# Altium PCB sparkfun-battery-babysitter.PcbDoc
Units mil, origin at the board's own origin, x right, y up, seen from the top; angles counter-clockwise.
Board outline 1300 x 1300 mil, 2 copper layers (Top, Bottom), stack 61.811 mil thick; 58 components, 31 nets, 150 pads, 51 vias.
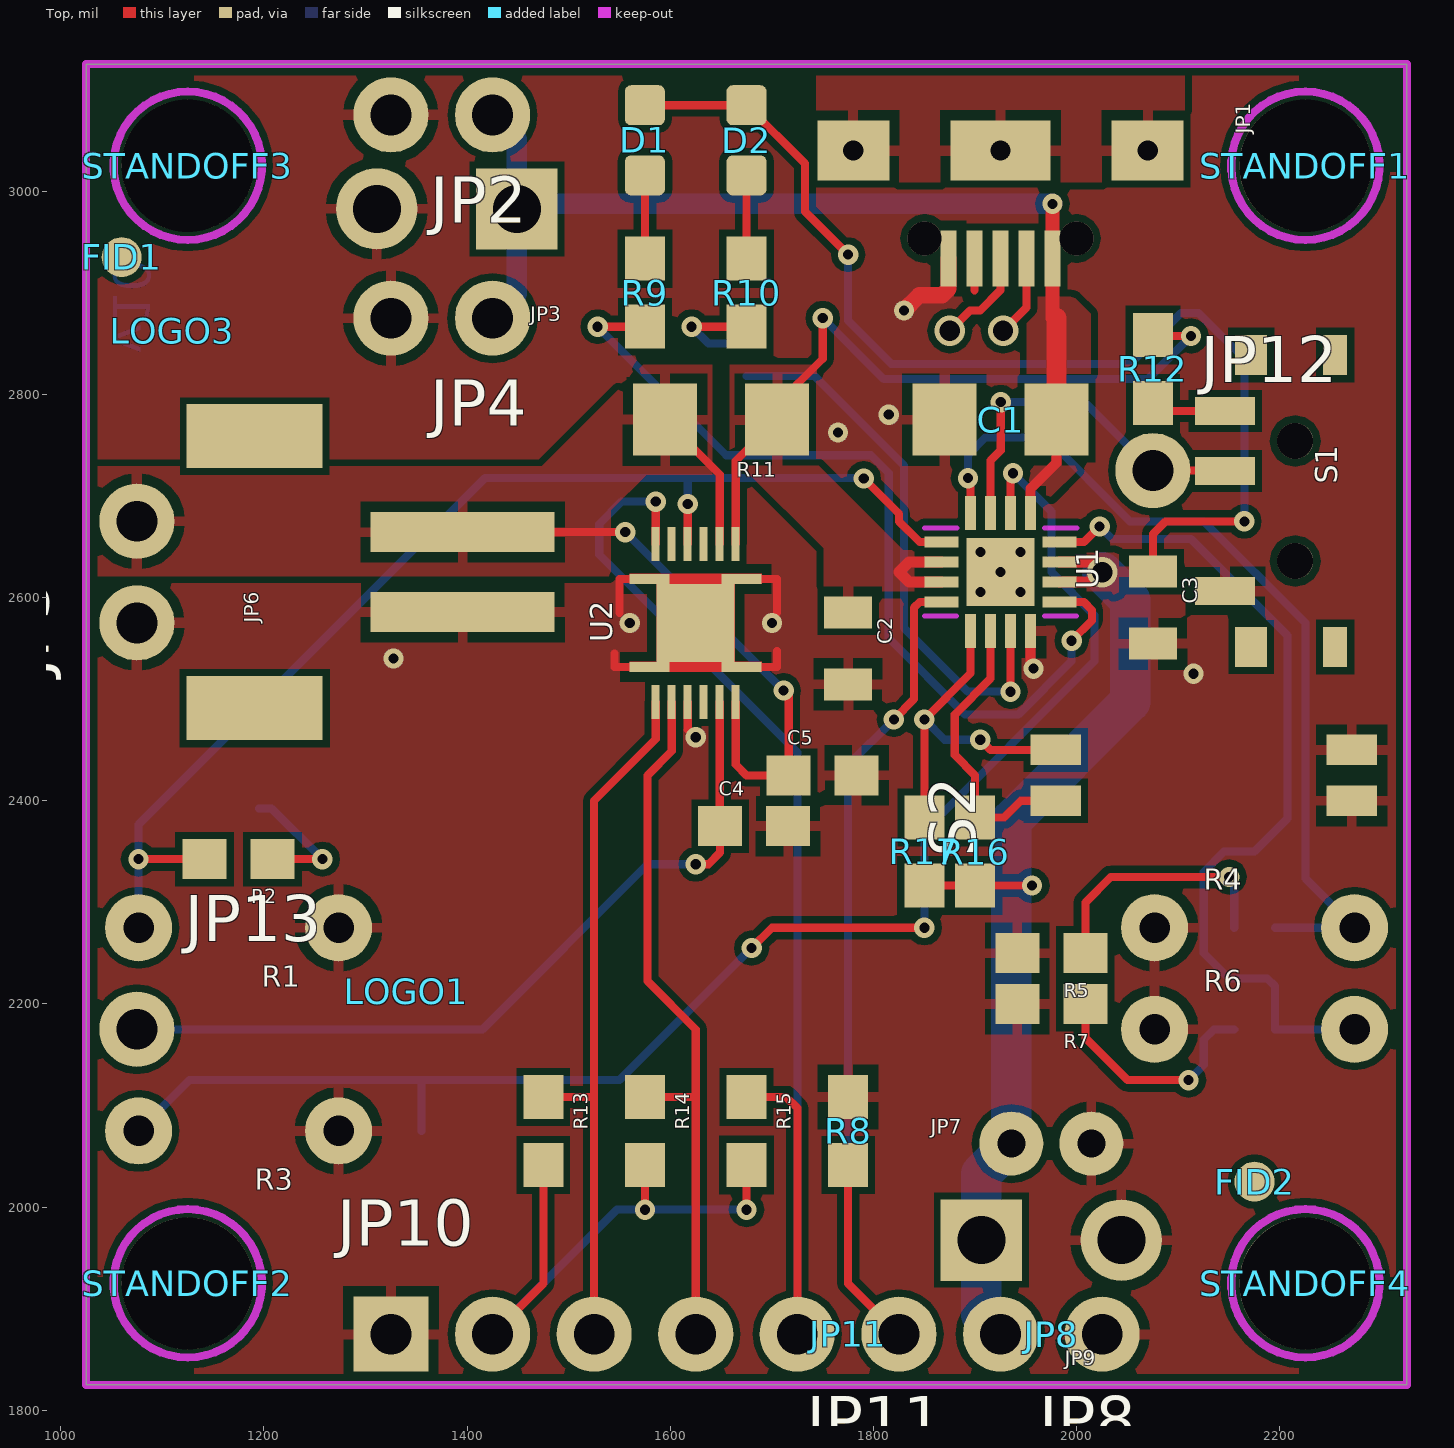
[diagram p0: Top view]
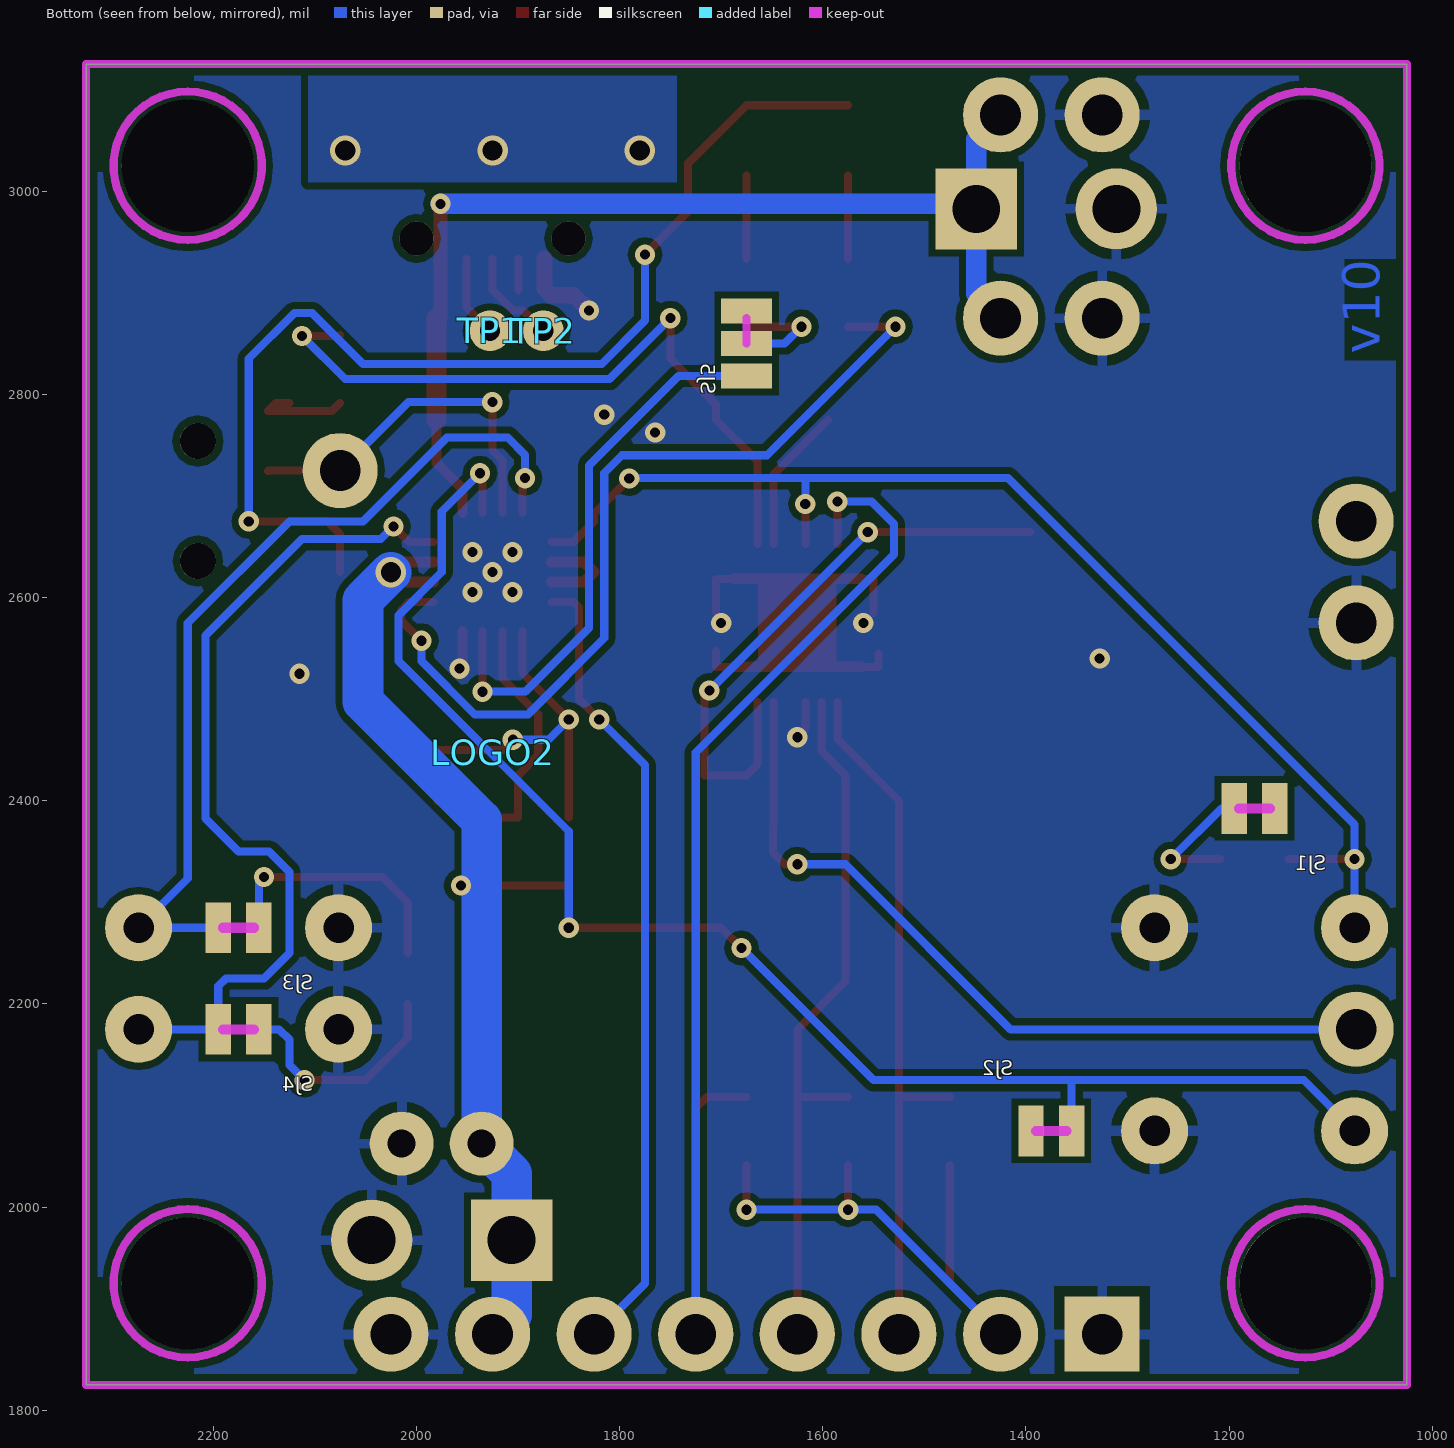
[diagram p1: Bottom view, seen from below]

## Layer stack, top to bottom
Top Solder: solder mask 0.4, Solder Resist, Dk 3.5
Top: signal copper 1.378
Dielectric 1: core 59.0551, FR-4, Dk 4.8
Bottom: signal copper 1.378
Bottom Solder: solder mask 0.4, Solder Resist, Dk 3.5

## Board outline
1025,3125 2325,3125 2325,1825 1025,1825

## Design rules (kind name [scope] priority, off if disabled: settings)
Clearance [All] p1: gap=7 ignorepadtopadclearanceinfootprint=FALSE except(0: SMDPad-SMDPad SMDPad-THPad SMDPad-Via)
Clearance "Clearance (Same Net)" [All] p2: gap=0 ignorepadtopadclearanceinfootprint=FALSE except(7: SMDPad-SMDPad SMDPad-THPad SMDPad-Via)
HoleSize HoleSize_1 [All] p1: absolutevalues=TRUE maxlimit=100000 minlimit=6 maxpercent=80.000 minpercent=20.000
HoleSize [All] p2: absolutevalues=TRUE maxlimit=100 minlimit=1 maxpercent=80.000 minpercent=20.000
HoleToHoleClearance mdViaViaSameLayer [All] p1: gap=8 allowstackedmicrovias=TRUE
HoleToHoleClearance [All] p2: gap=10 allowstackedmicrovias=TRUE
PasteMaskExpansion mlMinCreamFrame [All] p1: expansion=0
PasteMaskExpansion [All] p2: expansion=0
PolygonConnect ThermalVias [IsVia] p1: connectstyle=Direct reliefconductorwidth=10 reliefentries=4 polygonreliefangle="90 Angle" airgapwidth=10
PolygonConnect [All] p2: connectstyle=Relief reliefconductorwidth=10 reliefentries=4 polygonreliefangle="90 Angle" airgapwidth=10
RoutingVias [All] p1: holewidth=28 width=50 viastyle="Through Hole" minholewidth=28 minwidth=50 maxholewidth=28 maxwidth=50
SilkToSilkClearance [All] p1 off: silktosilkclearance=10
SilkToSolderMaskClearance [IsPad] p1 off: minsilkscreentomaskgap=10 clearancetoexposedcopper=TRUE
SolderMaskExpansion mlMinStopFrame [All] p1: expansion=4
SolderMaskExpansion [All] p2: expansion=4
Width Width_1 [All] p1: maxlimit=100000 minlimit=7 preferedwidth=10
Width [All] p2: maxlimit=10 minlimit=10 preferedwidth=10
25 further rules are at their usual default settings.

## Components (designator, comment, footprint, x,y, rotation, side; value= is the part's Value field where it differs from the comment)
C1 "1.0uF" 1206-CAP 1925,2775 r180 top
C2 "10uF" 0805-CAP 1775,2550 r270 top
C3 "10uF" 0805-CAP 2075,2590 r270 top
C4 "0.47uF" 0603-CAP 1682.5,2375 r0 top
C5 "1.0uF" 0603-CAP 1750,2425 r0 top
D1 "BLUE" LED-0603 1575,3050 r180 top
D2 "RED" LED-0603 1675,3050 r180 top
FID1 "" FIDUCIAL-1X2 1060,2935 r0 top
FID2 "" FIDUCIAL-1X2 2175,2025 r0 top
FRAME1 "" CREATIVE_COMMONS 1000,1000 r0 top
JP1 "USB-AB-MICRO-SMD_V03" USB-AB-MICRO-SMD_V03 1925,3040 r270 top
JP2 "" 1X02_NO_SILK 1425,3075 r180 top
JP3 "" SCREWTERMINAL-3.5MM-2-NS 1448.9,2982.5 r180 top
JP4 "" 1X02_NO_SILK 1425,2875 r180 top
JP5 "" 1X02_NO_SILK 1075,2575 r90 top
JP6 "" JST-2-SMD 1250,2625 r90 top
JP7 "" SCREWTERMINAL-3.5MM-2-NS 1906.1,1967.5 r0 top
JP8 "" 1X02_NO_SILK 2025,1875 r180 top
JP9 "" JST-2-PTH-NS 1975,2062.5 r180 top
JP10 "" 1X04_NO_SILK 1325,1875 r0 top
JP11 "" 1X02_NO_SILK 1825,1875 r180 top
JP12 "" 1X01_NO_SILK 2075,2725 r0 top
JP13 "" 1X01_NO_SILK 1075,2175 r0 top
LOGO1 "" SFE_LOGO_NAME_.1 1340,2212.5 r0 top
LOGO2 "" SFE_LOGO_NAME_FLAME_.1 1925,2447.5 r180 bottom
LOGO3 "" OSHW-LOGO-S 1110,2862.5 r0 top
R1 "TS" 1/6W-RES 1175,2275 r180 top
R2 "10K" 0603-RES 1175,2342.5 r180 top
R3 "TMR" 1/6W-RES 1175,2075 r180 top
R4 "ISET" 1/6W-RES 2175,2275 r0 top
R5 "590" 0603-RES 1975,2250 r180 top
R6 "ILIM" 1/6W-RES 2175,2175 r0 top
R7 "1.1k" 0603-RES 1975,2200 r180 top
R8 "100k" 0603-RES 1775,2075 r90 top
R9 "180" 0603-RES 1575,2900 r270 top
R10 "1K" 0603-RES 1675,2900 r270 top
R11 "0.01" 1206 1650,2775 r180 top
R12 "100k" 0603-RES 2075,2825 r270 top
R13 "4.7K" 0603-RES 1475,2075 r270 top
R14 "4.7K" 0603-RES 1575,2075 r270 top
R15 "10K" 0603-RES 1675,2075 r270 top
R16 "10K" 0603-RES 1900,2350 r90 top
R17 "10K" 0603-RES 1850,2350 r90 top
S1 "RIGHT_ANGLE_SLIDE_SWITCH_SMD" SWITCH-SPST-SMD-A 2215,2695 r270 top
S2 "SW_DIP-2_SMD" DIPSWITCH-02-50MIL 2125,2425 r90 top
SJ1 "" PAD-JUMPER-2-NC_BY_TRACE_YES_SILK 1175,2392.5 r0 bottom
SJ2 "" PAD-JUMPER-2-NC_BY_TRACE_YES_SILK 1375,2075 r180 bottom
SJ3 "" PAD-JUMPER-2-NC_BY_TRACE_YES_SILK 2175,2275 r0 bottom
SJ4 "" PAD-JUMPER-2-NC_BY_TRACE_YES_SILK 2175,2175 r0 bottom
SJ5 "" PAD-JUMPER-3-2OF3_NC_BY_TRACE_YES_SILK_FULL_BOX 1675,2850 r90 bottom
STANDOFF1 "" STAND-OFF 2225,3025 r0 top
STANDOFF2 "" STAND-OFF 1125,1925 r0 top
STANDOFF3 "" STAND-OFF 1125,3025 r0 top
STANDOFF4 "" STAND-OFF 2225,1925 r0 top
TP1 "" PAD.03X.04 1927.5,2862.5 r180 bottom
TP2 "" PAD.03X.04 1875,2862.5 r180 bottom
U1 "BQ24075" PVQFN-N16 1925,2625 r270 top
U2 "BQ27441-G1" PDSO-N12 1625,2575 r0 top

## Footprints (in the part's own frame and the unit in brackets; to place one, negate y for a bottom-side part, rotate by r counter-clockwise, add the part's x,y. Pads: shape width x height; smd on the part's side, far side on the other; paste and mask are expansions set on the pad)
1/6W-RES [mil] "1/6W-RES"
  round 66 hole 30: 1(-98.43,0) 2(98.43,0)
1X01_NO_SILK [mil] "1X01_NO_SILK"
  round 74 hole 40: 1(0,0)
1X02_NO_SILK [mil] "1X02_NO_SILK"
  round 74 hole 40: 1(0,0) 2(100,0)
1X04_NO_SILK [mil] "1X04_NO_SILK"
  rect 74x74 hole 40: 1(0,0)
  round 74 hole 40: 2(100,0) 3(200,0) 4(300,0)
0603-CAP [mm] "0603-CAP"
  rect 1.1x1 smd: 1(-0.85,0) 2(0.85,0)
0603-RES [mm] "0603-RES"
  rect 1.1x1 smd: 1(-0.85,0) 2(0.85,0)
0805-CAP [mil] "0805-CAP"
  rect 31.5x47.24 smd: 1(-35.43,0) 2(35.43,0)
1206 [mil] "1206"
  rect 62.99x70.87 smd: 1(-55.12,0) 2(55.12,0)
1206-CAP [mil] "1206-CAP"
  rect 62.99x70.87 smd: 1(-55.12,0) 2(55.12,0)
CREATIVE_COMMONS [mil] "CREATIVE_COMMONS"
DIPSWITCH-02-50MIL [mil] "DIPSWITCH-02-50MIL"
  rect 30x50 smd: 1(-25,-145.67) 2(25,-145.67) 3(25,145.67) 4(-25,145.67)
FIDUCIAL-1X2 [mm] "FIDUCIAL-1X2"
  rrect100% 1x1 smd paste-0.5: 1(0,0)
JST-2-PTH-NS [mm] "JST-2-PTH-NS"
  round 1.6 hole 0.7: 1(-1,0) 2(1,0)
JST-2-SMD [mm] "JST-2-SMD"
  rect 1x4.6 smd: 1(-1,-3.7) 2(1,-3.7)
  rect 1.6x3.4 smd: NC1(-3.4,1.5) NC2(3.4,1.5)
LED-0603 [mm] "LED-0603"
  rrect30% 1x1 smd: A(0,-0.877) C(0,0.877)
OSHW-LOGO-S [mil] "OSHW-LOGO-S"
PAD-JUMPER-2-NC_BY_TRACE_YES_SILK [mil] "PAD-JUMPER-2-NC_BY_TRACE_YES_SILK"
  rect 25x50 smd paste-25: 1(-20,0) 2(20,0)
  Top keep-out lines w10: -15,0 15,0
PAD-JUMPER-3-2OF3_NC_BY_TRACE_YES_SILK_FULL_BOX [mil] "PAD-JUMPER-3-2OF3_NC_BY_TRACE_YES_SILK_FULL_BOX"
  rect 25x50 smd paste-25: 1(-32,0) 2(0,0) 3(32,0)
  Top keep-out lines w8: 0,0 25,0
PAD.03X.04 [mil] "PAD.03X.04"
  rrect100% 40x40 smd paste-20: P$1(0,0)
PDSO-N12 [mm] "PDSO-N12"
  rect 0.2x0.85 smd paste-0.425: 1(-1,-1.975) 2(-0.6,-1.975) 3(-0.2,-1.975) 4(0.2,-1.975) 5(0.6,-1.975) 6(1,-1.975) 7(1,1.975) 8(0.6,1.975) 9(0.2,1.975) 10(-0.2,1.975) 11(-0.6,1.975) 12(-1,1.975)
  rect 1.95x1.95 smd paste-0.975: EP(0,0)
  rect 1x0.25 smd paste-0.5: EP1(-1.15,1.1) EP2(-1.15,-1.1) EP3(1.15,-1.1) EP4(1.15,1.1)
  Top region: 1.65,1.225 -1.65,1.225 -1.65,0.975 -0.975,0.975 -0.975,-0.975 -1.65,-0.975 -1.65,-1.225 1.65,-1.225 1.65,-0.975 0.975,-0.975 0.975,0.975 1.65,0.975
PVQFN-N16 [mil] "PVQFN-N16"
  rect 11.02x33.46 smd paste-16.73: 1(-29.53,-58.07) 2(-9.84,-58.07) 3(9.84,-58.07) 4(29.53,-58.07) 9(29.53,58.07) 10(9.84,58.07) 11(-9.84,58.07) 12(-29.53,58.07)
  rect 33.46x11.02 smd paste-16.73: 5(58.07,-29.53) 6(58.07,-9.84) 7(58.07,9.84) 8(58.07,29.53) 13(-58.07,29.53) 14(-58.07,9.84) 15(-58.07,-9.84) 16(-58.07,-29.53)
  rect 66.93x66.93 smd paste-33.47: EP(0,0)
  Top keep-out lines w5: 43.31,-75 43.31,-43.31 ; -43.31,-74.8 -43.31,-43.11 ; 43.31,43.11 43.31,74.8 ; -43.31,43.31 -43.31,75
SCREWTERMINAL-3.5MM-2-NS [mil] "SCREWTERMINAL-3.5MM-2-NS"
  rect 80x80 hole 47.24: 1(0,0)
  round 80 hole 47.24: 2(137.8,0)
SFE_LOGO_NAME_.1 [mil] "SFE_LOGO_NAME_.1"
SFE_LOGO_NAME_FLAME_.1 [mil] "SFE_LOGO_NAME_FLAME_.1"
STAND-OFF [mil] "STAND-OFF"
  round 130 hole 130: 1(0,0)
  Top keep-out lines w8: 0,-73 ccw(c0,0) 0,73 ccw(c0,0) 0,-73
  Bottom keep-out lines w8: 0,-73 ccw(c0,0) 0,73 ccw(c0,0) 0,-73
SWITCH-SPST-SMD-A [mm] "SWITCH-SPST-SMD-A"
  rect 0.7x1.5 smd: 1(-2.25,-1.75) 2(-0.75,-1.75) 3(2.25,-1.75)
  round 0.9 hole 0.9: 1(-1.5,0) 1(1.5,0)
  rect 1x0.6 smd: GND1(-3.65,1) GND3(3.65,1)
  rect 1x0.8 smd: GND2(-3.65,-1.1) GND4(3.65,-1.1)
USB-AB-MICRO-SMD_V03 [mm] "USB-AB-MICRO-SMD_V03"
  round 0.85 hole 0.85: 1(2.2,1.9) 1(2.2,-1.9)
  rect 1.4x0.4 smd: D+1(2.7,0) D-1(2.7,0.65) GND1(2.7,-1.3) ID1(2.7,-0.65) VBUS1(2.7,1.3)
  rect 1.5x1.8 smd: SHIELD1(0,3.68) SHIELD3(0,-3.68)
  rect 1.5x2.5 smd: SHIELD2(0,0)

## Part data
C1: library part 1206-CAP
C2 C3: library part 0805-CAP
C4 C5: library part 0603-CAP
D1 D2: library part LED-0603
FID1 FID2: library part FIDUCIAL-1X2
FRAME1: library part CREATIVE_COMMONS
JP2 JP4 JP5 JP8 JP11: library part 1X02_NO_SILK
JP3 JP7: library part SCREWTERMINAL-3.5MM-2-NS
JP6: library part JST-2-SMD
JP9: library part JST-2-PTH-NS
JP10: library part 1X04_NO_SILK
JP12 JP13: library part 1X01_NO_SILK
LOGO1: library part SFE_LOGO_NAME_.1
LOGO2: library part SFE_LOGO_NAME_FLAME_.1
LOGO3: library part OSHW-LOGO-S
R1 R3 R4 R6: library part 1/6W-RES
R2 R5 R7 R8 R9 R10 R12 R13 R14 R15 R16 R17: library part 0603-RES
R11: library part 1206
S1: library part SWITCH-SPST-SMD-A
S2: library part DIPSWITCH-02-50MIL
SJ1 SJ2 SJ3 SJ4: library part PAD-JUMPER-2-NC_BY_TRACE_YES_SILK
SJ5: library part PAD-JUMPER-3-2OF3_NC_BY_TRACE_YES_SILK_FULL_BOX
STANDOFF1 STANDOFF2 STANDOFF3 STANDOFF4: library part STAND-OFF
TP1 TP2: library part PAD.03X.04
U1: library part PVQFN-N16
U2: library part PDSO-N12

## Via types
v1: diameter 20/20 (per signal layer), hole 10, Top to Bottom, 45 vias
v2: diameter 30/30 (per signal layer), hole 20, Top to Bottom, 4 vias
v3: diameter 30/38 (per signal layer), hole 20, Top to Bottom, 2 vias

## Nets (pads, with @x,y where several pads share a name; then routed paths per layer and width w, separated by ;. In a path a pad name is that pad's centre, name@x,y a point inside that pad or via, vN(x,y) a via of type N, cw(c..) or ccw(c..) an arc to the next point about the centre after c; other vN are vias at no path point)
1.8V: C4.1 JP13.1 U2.5 | length 794.5
  Top w8: v1(1625,2337.5) 1637.5,2337.5 1649.04,2349.04 C4.1 1648.62,2375.41 U2.5
  Bottom w8: JP13.1 1415,2175 1577.5,2337.5 v1(1625,2337.5)
!CE!: JP11.1 R8.1 U1.4 | length 979.1
  Top w8: R8.1 1775,1925 JP11.1 ; v1(1820,2480) 1840,2500 1840,2590 1845.47,2595.47 U1.4
  Bottom w8: v1(1820,2480) 1775,2435 1775,1925 JP11.1
!CHG!: R9.2 U1.9 | length 881.6
  Top w8: v1(1528.46,2866.54) R9.2 ; U1.9 2007.03,2595.47 2015,2587.5 2015,2577.5 v1(1995,2557.5)
  Bottom w8: v1(1528.46,2866.54) 1655,2740 1797.5,2740 1815,2722.5 1815,2560 1890,2485 1942.5,2485 1995,2537.5 v1(1995,2557.5)
!PGOOD!: U1.7 | length 541.8
  Top w8: v1(1934.84,2507.34) U1.7
  Bottom w8: 1675,2818 1742,2818 1830,2730 1830,2570 1892.66,2507.34 v1(1934.84,2507.34)
BATTERY_IN: C5.1 JP5.2 JP6.2 R11.2 U2.6 U2.8 | length 728.7
  Top w8: JP6.2 v1(1555.63,2664.37) ; R11.2 1648.62,2721.26 U2.8 ; U2.6 1664.37,2435.63 1675,2425 C5.1 1716.54,2503.46 v1(1711.54,2508.46)
  Bottom w8: v1(1555.63,2664.37) v1(1711.54,2508.46)
D+: JP1.D+1 | length 97.8
  Top w8: v3(1875,2862.5) 1895,2882.5 1905,2882.5 1925,2902.5 JP1.D+1
D-: JP1.D-1 | length 80.8
  Top w8: v3(1927.5,2862.5) 1950.59,2885.59 JP1.D-1
EN1: R16.2 S2.4 U1.6 | length 292.5
  Top w8: U1.6 1915.16,2520.16 1880,2485 1880,2445 1900,2425 R16.2 1928.46,2383.46 1945,2400 S2.4
EN2: R17.2 S2.3 U1.5 | length 344.1
  Top w8: R17.2 v1(1850,2480) 1895.47,2525.47 U1.5 ; v1(1905,2460) 1915,2450 S2.3
  Bottom w8: v1(1850,2480) 1870,2460 v1(1905,2460)
GND: C1.2 C2.2 C3.2 C4.2 C5.2 JP1.GND1 JP2.2 JP3.2 JP4.2 JP5.1 JP6.1 JP7.2 JP8.1 JP9.1 JP10.1 R1.1 R3.1 R4.1 R5.2 R6.1 R7.2 R8.2 S1.3 S2.1 S2.2 U1.8 U1.EP U2.3 U2.EP U2.EP1 U2.EP2 U2.EP3 U2.EP4 | length 424.4
  Top w8: 1545,2545 1545,2531.69 U2.EP2 ; 1550,2585 1550,2618.31 U2.EP1 ; U2.3 1617.13,2470.37 v1(1625,2462.5) ; U2.EP3 1705,2531.69 1705,2547.5 ; U2.EP4 1705,2618.31 1705,2585
  Top w10: U2.EP1 1625,2618.31 ; v1@1954.53,2537.97 U1.8
  Top w16: v1(1830,2882.5) 1845,2897.5 1867.5,2897.5 1873.82,2903.82 JP1.GND1
  other v1: 2115,2525 1957.5,2530 1327.5,2540 1560,2575 1700,2575 1905.32,2605.32 1944.69,2605.32 1925,2625 1905.32,2644.69 1944.69,2644.69 1765,2762.5 1815,2780
GPOUT: JP11.2 R15.1 U2.12 | length 1261.6
  Top w8: U2.12 v1(1585.63,2694.37) ; R15.1 1714.04,2108.46 1725,2097.5 JP11.2
  Bottom w8: v1(1585.63,2694.37) 1551.87,2694.37 1530,2672.5 1530,2642.5 1725,2447.5 JP11.2
ILIM: R6.2 U1.12 | length 844
  Top w8: U1.12 2007.03,2654.53 v1(2022.5,2670)
  Bottom w8: v1(2022.5,2670) 2035,2657.5 2112.5,2657.5 2207.5,2562.5 2207.5,2382.5 2175,2350 2145,2350 2125,2330 2125,2250 2150,2225 2187.5,2225 2195,2217.5 2195,2175 R6.2
ISET: R4.2 U1.16 | length 871.6
  Top w8: v1(1892.97,2717.5) 1895.47,2715 U1.16
  Bottom w8: v1(1892.97,2717.5) 1892.97,2740.47 1910,2757.5 1970,2757.5 2052.5,2675 2125,2675 2225,2575 2225,2323.43 R4.2 2195,2275
N$1: R2.1 | length 132.3
  Top w8: R2.1 v1(1257.5,2342.5)
  Bottom w8: 1195,2392.5 1207.5,2392.5 v1(1257.5,2342.5)
N$2: R7.1 | length 232.6
  Top w8: R7.1 2008.46,2166.54 2050,2125 v1(2110,2125)
  Bottom w8: v1(2110,2125) 2125,2140 2125,2165 2135,2175 2155,2175
N$3: R5.1 | length 254
  Top w8: R5.1 2008.46,2300 2033.46,2325 v1(2150,2325)
  Bottom w8: v1(2150,2325) 2155,2320 2155,2275
N$4: R12.2 S1.1@2146.1,2783.58 | length 98.8
  Top w8: R12.2 2082.95,2783.58 2146.1,2783.58 2138.15,2791.54 S1.1@2125,2791.54
N$5: R10.2 | length 114.9
  Top w8: v1(1620.96,2866.54) R10.2
  Bottom w8: v1(1620.96,2866.54) 1637.5,2850 1675,2850
N$11: D1.C R9.1 | length 82
  Top w8: R9.1 D1.C
N$12: D2.C R10.1 | length 82
  Top w8: R10.1 D2.C
OUT: C3.1 D1.A D2.A JP7.1 JP8.2 JP9.2 R16.1 R17.1 U1.10 U1.11 | length 2210.8
  Top w8: D1.A D2.A 1732.5,3027.03 1732.5,2980 v1(1775,2937.5) ; R17.1 R16.1 v1(1955.96,2316.54) ; C3.1 2075,2662.5 2087.5,2675 v1(2165,2675)
  Top w11: U1.10 2015.16,2615.16 v2(2025,2625) 2015.16,2634.84 U1.11
  Bottom w8: v1(1775,2937.5) 1775,2872.5 1817.5,2830 2052.5,2830 2102.5,2880 2120,2880 2165,2835 v1(2165,2675) ; 1935.63,2205 1935.63,2225 1935.63,2275 ; 1935.63,2316.54 v1(1955.96,2316.54)
  Bottom w40: JP8.2 1906.1,1893.9 JP7.1 1906.1,2032.97 JP9.2 1935.63,2225 1935.63,2316.54 1935.63,2380.63 2052.5,2497.5 2052.5,2597.5 v2(2025,2625)
SCL: JP10.4 R14.1 U2.2 | length 701.8
  Top w8: R14.1 1625,2108.46 ; U2.2 1601.38,2448.88 1577.5,2425 1577.5,2222.5 1625,2175 1625,2108.46 ; JP10.4 1625,2108.46
SDA: JP10.3 R13.1 U2.1 | length 697.4
  Top w8: R13.1 1525,2108.46 ; JP10.3 1525,2108.46 ; U2.1 1585.63,2460.63 1525,2400 1525,2108.46
SHIELD: JP1.SHIELD1 JP1.SHIELD2 JP1.SHIELD3
  other v2: 1780.12,3040 1925,3040 2069.88,3040
SYSOFF: JP12.1 S1.2 U1.15 | length 362.4
  Top w8: U1.15 1915.16,2734.84 1925.16,2744.84 v1(1925.16,2792.34) ; JP12.1 2145.63,2725 S1.2
  Bottom w8: v1(1925.16,2792.34) 2007.66,2792.34 JP12.1
TMR: R3.2 U1.14 | length 1496.5
  Top w8: v1(1680,2255) 1700,2275 v1(1850,2275) ; U1.14 1934.84,2719.84 v1(1937.34,2722.34)
  Bottom w8: R3.2 1126.57,2125 1355,2125 ; 1355,2075 1355,2125 ; v1(1680,2255) 1550,2125 1355,2125 ; v1(1850,2275) 1850,2370 2017.5,2537.5 2017.5,2582.5 1975,2625 1975,2684.69 v1(1937.34,2722.34)
TS: R1.2 R2.2 U1.1 U2.10 | length 1193.3
  Top w8: v1(1076.57,2342.5) R2.2 ; U2.10 v1(1617.13,2692.13) ; v1(1790.37,2717.13) 1825,2682.5 1825,2675 1845.47,2654.53 U1.1
  Bottom w8: R1.2 v1(1076.57,2342.5) 1076.57,2376.57 1417.5,2717.5 1617.13,2717.5 ; v1(1617.13,2692.13) 1617.13,2717.5 ; v1(1790.37,2717.13) 1790,2717.5 1617.13,2717.5
USB_ID: JP1.ID1 | length 31.2
  Top w8: 1899.41,2902.5 JP1.ID1
V_BATT: C2.1 R11.1 R12.1 U1.2 U1.3 U2.7 | length 792.6
  Top w8: U2.7 1664.37,2734.25 R11.1 1705.12,2790.12 1750,2835 v1(1750,2875) ; R12.1 2075.96,2857.5 v1(2112.5,2857.5)
  Top w11: U1.3 1834.84,2615.16 1825,2625 1834.84,2634.84 U1.2
  Bottom w8: v1(1750,2875) 1810,2815 2070,2815 v1(2112.5,2857.5)
V_PU: JP10.2 R13.2 R14.2 R15.2 | length 576.1
  Top w8: JP10.2 1475,1925 R13.2 ; v1(1575,1997.5) R14.2 ; v1(1675,1997.5) R15.2
  Bottom w8: JP10.2 1547.5,1997.5 v1(1575,1997.5) v1(1675,1997.5)
V_USB: C1.1 JP1.VBUS1 JP2.1 JP3.1 JP4.1 U1.13 | length 1064.2
  Top w10: U1.13 1954.53,2707.03 1980.12,2732.62 C1.1
  Top w14: 1976.18,2875.12 JP1.VBUS1 v1(1976.18,2987.5)
  Top w20: C1.1 1980.12,2875.12
  Bottom w20: JP4.1 1448.9,2898.9 JP3.1 ; JP2.1 1448.9,3051.1 JP3.1 ; v1(1976.18,2987.5) 1453.9,2987.5 JP3.1
pads on no net: FID1.1 FID2.1 JP1.1 JP6.NC1 JP6.NC2 S1.1@2215,2635.94 S1.1@2215,2754.06 S1.GND1 S1.GND2 S1.GND3 S1.GND4 SJ1.1 SJ1.2 SJ2.1 SJ2.2 SJ3.1 SJ3.2 SJ4.1 SJ4.2 SJ5.1 SJ5.2 SJ5.3 STANDOFF1.1 STANDOFF2.1 STANDOFF3.1 STANDOFF4.1 TP1.P$1 TP2.P$1 U2.4 U2.9 U2.11

## Polygon pours and split planes (outlines as drawn)
no net on Top Assembly (solid): 2295,2592.93 2265.43,2622.5 2324.57,2622.5
no net on Top Assembly (solid): 2295,2797.07 2324.57,2767.5 2265.43,2767.5
V_BATT on Top "Top-V_BATT" (solid, remove dead copper, pour order 0): 1658.5,2829 1744,2829 1744,2731.66 1829.16,2646.5 1854,2646.5 1854,2606 1799,2606 1799,2571 1751,2571 1751,2648.34 1658.5,2740.84
GND on Top "Top-GND" (solid, remove dead copper, pour order 2): 1020,3130 1020,1820 2330,1820 2330,3130
V_USB on Top "Top-V_USB" (solid, remove dead copper, pour order 6): 1951,2666 1951,2891.66 1968.34,2909 1984.16,2909 2014,2879.16 2014,2738.34 1969,2693.34 1969,2666
SHIELD on Top "Top-SHIELD" (solid, remove dead copper, pour order 10): 2106.5,3129 2106.5,3008.5 1743.5,3008.5 1743.5,3129
BATTERY_IN on Top "Top-BATTERY_IN" (solid, remove dead copper, pour order 12): 1021,2729 1473.34,2729 1573.34,2829 1641.5,2829 1641.5,2721 1576.66,2721 1541.5,2685.84 1541.5,2621 1021,2621
OUT on Top "Top-OUT" (solid, remove dead copper, pour order 14): 1996,2644 2035.84,2644 2040.84,2649 2104,2649 2104,2601 2038.34,2601 2033.34,2606 1996,2606
GND on Bottom "Bottom-GND" (solid, remove dead copper, pour order 4): 1020,3130 1020,1820 2330,1820 2330,3130
SHIELD on Bottom "Bottom-SHIELD" (solid, remove dead copper, pour order 8): 1743.5,3129 1743.5,3008.5 2106.5,3008.5 2106.5,3129

## Keep-outs
Keep-Out Layer:
  the board outline again, w8

## Other copper
Bottom:
  text "v10" at 1040,2840 h62 r270

## Silkscreen, mask and mechanical layers (free items; w line width, h text height)
Dimension:
  the board outline again, w8
Top Assembly:
  lines w8: 1025,2375 1525,2375 1525,2782.5 ; 1027.5,2782.5 1190,2782.5 ; 1190,3125 1190,2782.5 ; 1525,3125 1525,2782.5 ; 1835,2005 1835,2157.5 2040,2157.5 ; 2115,1825 2115,2140 ; 1190,2782.5 1525,2782.5
  lines w10: 1052.5,2750 1097.5,2750 ; 1075,2477.5 1075,2522.5 ; 1075,2727.5 1075,2772.5 ; 1250,2820 1295,2820 ; 1445,2820 1490,2820 ; 1467.5,2797.5 1467.5,2842.5 ; 1847.5,2120 1892.5,2120 ; 1870,2097.5 1870,2142.5 ; 2057.5,2120 2102.5,2120
  lines w20: 2295,2620 2295,2772.5
  text "CHG" at 1547.83,2965.48 h27.2
  text "PWR" at 1639.67,2957.32 h27.2
  text "Charge" at 2154.41,2946.38 h27.2 r90
  text "4.35-6.4V" at 1244.48,2841.23 h32.3 r90
  text "OFF" at 2315.99,2797.5 h32.3 r90
  text "V" at 1334.02,2790 h38.25
  text "IN" at 1370,2790 h29.75
  text "ON" at 2315.99,2536.49 h32.3 r90
  text "EN2" at 2239.67,2475 h27.2
  text "1s LiPo" at 1275,2422.15 h27.2
  text "V" at 1089.02,2400 h38.25
  text "BATT" at 1125,2400 h29.75
  text "3.3-4.2V" at 1275,2382.15 h27.2
  text "EN1" at 2244.2,2334.65 h27.2
  text "Battery" at 1459.94,2233.29 h38.25
  text "Babysitter" at 1447.19,2195.04 h38.25
  text "1.8V" at 1125,2177.91 h34
  text "OUT" at 1125,2127.91 h34
  text "V" at 1911.52,2105 h38.25
  text "OUT" at 1945,2105 h29.75
  text "GND" at 1347.09,1925 h34 r90
  text "VPU" at 1447.09,1925 h34 r90
  text "SDA" at 1547.09,1925 h34 r90
  text "SCL" at 1647.09,1925 h34 r90
  text "GPOUT" at 1747.09,1925 h34 r90
  text "!CE!" at 1849.93,1925 h34 r90
Bottom Assembly:
  region: 2260,2525 2260,2475 2210,2475 2210,2525
  region: 2310,2475 2310,2425 2260,2425 2260,2475
  region: 2310,2575 2310,2525 2260,2525 2260,2575
  region: 2260,2575 2260,2525 2210,2525 2210,2575
  lines w8: 2210,2375 2260,2375 ; 2210,2375 2050,2375 2050,2575 2210,2575 ; 2210,2375 2210,2425 ; 2210,2425 2210,2475 ; 2210,2425 2260,2425 ; 2210,2475 2210,2525 ; 2210,2475 2260,2475 ; 2210,2525 2260,2525 ; 2210,2525 2210,2575 ; 2210,2575 2260,2575 ; 2260,2375 2310,2375 2310,2425 ; 2260,2375 2260,2425 ; 2260,2425 2260,2475 ; 2260,2425 2310,2425 ; 2260,2475 2260,2525 ; 2260,2475 2310,2475 ; 2260,2525 2310,2525 ; 2260,2525 2260,2575 ; 2260,2575 2310,2575 2310,2525 ; 2310,2425 2310,2475 ; 2310,2475 2310,2525
  lines w10: 1052.5,2750 1097.5,2750 ; 1075,2477.5 1075,2522.5 ; 1075,2727.5 1075,2772.5 ; 1250,2820 1295,2820 ; 1445,2820 1490,2820 ; 1467.5,2797.5 1467.5,2842.5 ; 1847.5,2045 1892.5,2045 ; 1870,2022.5 1870,2067.5 ; 2062.5,2050 2107.5,2050
  text "PWR" at 1712.83,2915 h27.2
  text "D+" at 1865.48,2898.16 h27.2 r270
  text "D-" at 1917.98,2898.16 h27.2 r270
  text "4.35-6.4V" at 1222.5,2841.23 h32.3 r270
  text "SEL" at 1725,2812.17 h27.2 r270
  text "IN" at 1380,2790 h29.75
  text "V" at 1415.98,2790 h38.25
  text "!PGD!" at 1724.4,2732.62 h27.2
  text "PWR-LED" at 1697.8,2730.59 h27.2 r270
  text "SYSOFF" at 2025,2702.91 h34
  text "EN" at 2291.74,2620 h27.2
  text "CHG" at 2150,2582.5 h29.75
  text "I" at 2175,2582.5 h38.25
  text "2" at 2245.64,2582.5 h27.2
  text "1" at 2291.11,2582.5 h27.2
  text "BATT" at 1150,2580 h29.75 r270
  text "V" at 1150,2544.02 h38.25 r270
  text "100mA" at 2200,2532.32 h27.2
  text "500mA" at 2200,2482.32 h27.2
  text "Battery" at 1858.4,2448.1 h42.5
  text "ILIM" at 2200,2432.32 h27.2
  text "TS" at 1332.86,2407.02 h27.2
  text "Babysitter" at 1872.56,2405.6 h42.5
  text "OFF" at 2200,2382.32 h27.2
  text "Disable" at 1405.37,2379.82 h27.2
  text "ISET" at 2231.51,2325 h29.75
  text "TS" at 1171.65,2263.11 h34
  text "1.8V" at 1238.5,2177.91 h34
  text "OUT" at 1215.84,2127.91 h34
  text "OUT" at 1994.12,2105 h29.75
  text "V" at 2033.48,2105 h38.25
  text "ILIM" at 2229.03,2086.33 h29.75
  text "TMR" at 1560.05,2084.52 h27.2
  text "TMR" at 1205.64,2063.11 h34
  text "Set" at 1496.61,2057.32 h27.2
  text "GND" at 1302.91,1925 h34 r270
  text "VPU" at 1402.91,1925 h34 r270
  text "SDA" at 1502.91,1925 h34 r270
  text "SCL" at 1602.91,1925 h34 r270
  text "GPOUT" at 1702.91,1925 h34 r270
  text "!CE!" at 1800.07,1925 h34 r270
Assembly Top:
  text "Jim Lindblom" at 2200,1000 h59.5
Measures:
  text "Units in inches" at 580.58,1514.65 h27.2

## Dimensions
1025,1825 to 2325,1825 on Mechanical 16
1025,1825 to 1125,1925 on Mechanical 16
1025,1825 to 1325,1875 on Mechanical 16
1025,1825 to 2225,1925 on Mechanical 16
1025,1825 to 1025,3125 on Mechanical 16
1025,1825 to 1325,1875 on Mechanical 16
1025,1825 to 1125,1925 on Mechanical 16
1025,1825 to 1125,3025 on Mechanical 16
1025,1825 to 1175,2175 on Mechanical 16
1025,1825 to 1075,2275 on Mechanical 16

## Text inside footprints (layer, text, board x,y; h text height)
FRAME1: Assembly Top "Released under the Creative Commons Attribution Share-Alike 4.0 License" at 200,1200 h59.5; Assembly Top "https://creativecommons.org/licenses/by-sa/4.0/" at 1000,1100 h59.5; Assembly Top "Designed by:" at 1450,1000 h59.5
JP1: Assembly Top "PCB Front" at 2171.55,3147.25 h18.6 r90
JP9: Assembly Top "+" at 1918.68,1986.11 h77.5; Assembly Top "-" at 2011.26,1999.02 h77.5
S2: Top Assembly "ON" at 2073.19,2398.66 h25.5 r90; Top Assembly "1" at 2248.19,2390.65 h25.5 r90; Top Assembly "2" at 2248.19,2436.4 h25.5 r90